# Altium PCB HUP2.PcbDoc
Units mm, origin at the board's own origin, x right, y up, seen from the top; angles counter-clockwise.
Board outline 41.45 x 18.25 mm, 2 copper layers (Top Layer, Bottom Layer), stack 0.325 mm thick; 40 components, 31 nets, 165 pads, 91 vias.
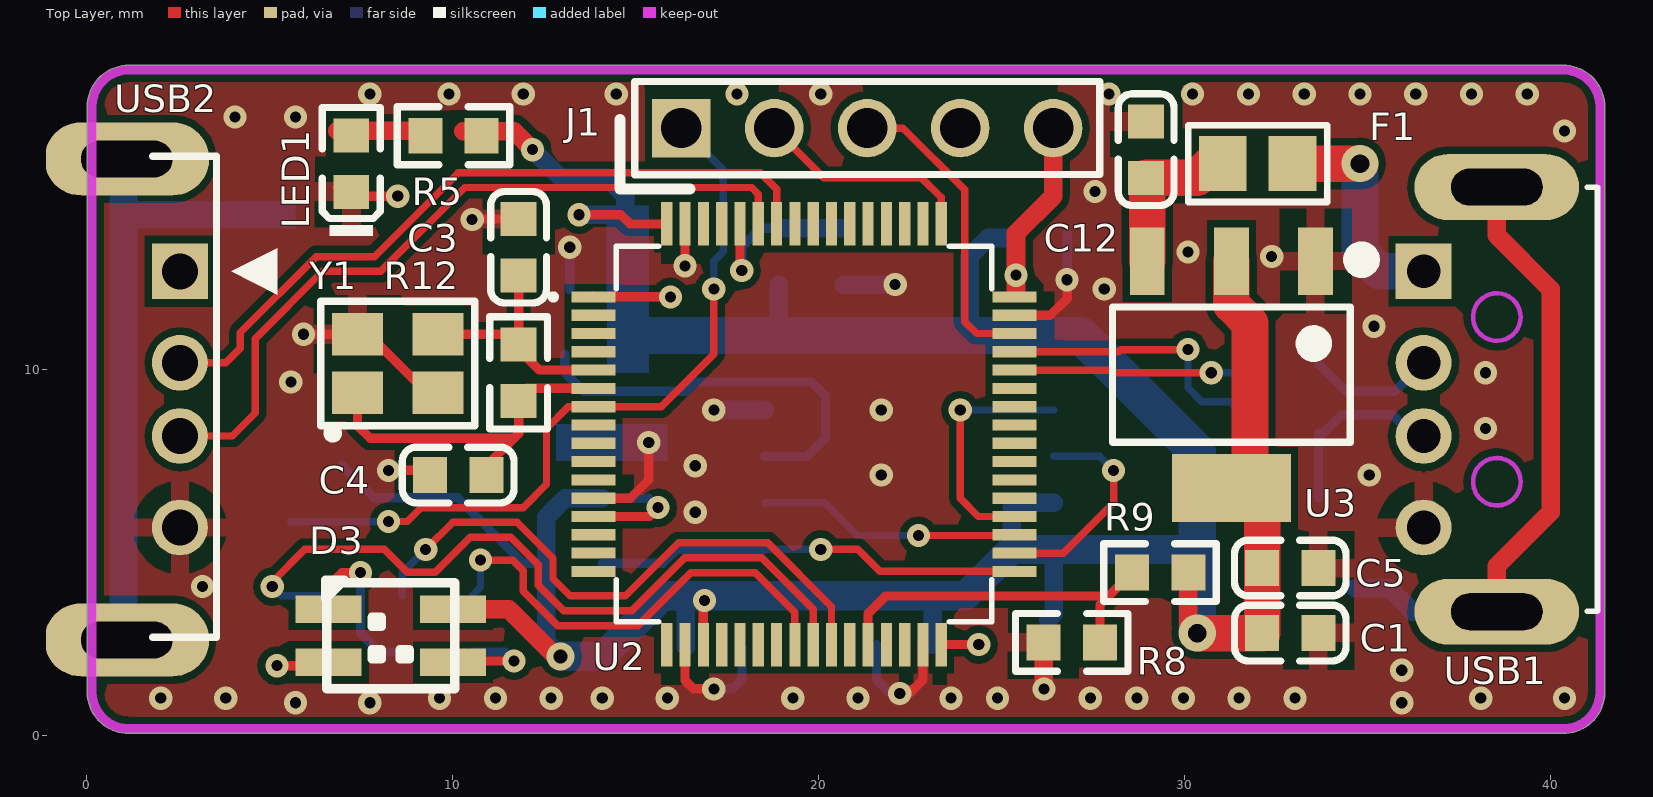
[diagram p0: Top Layer view]
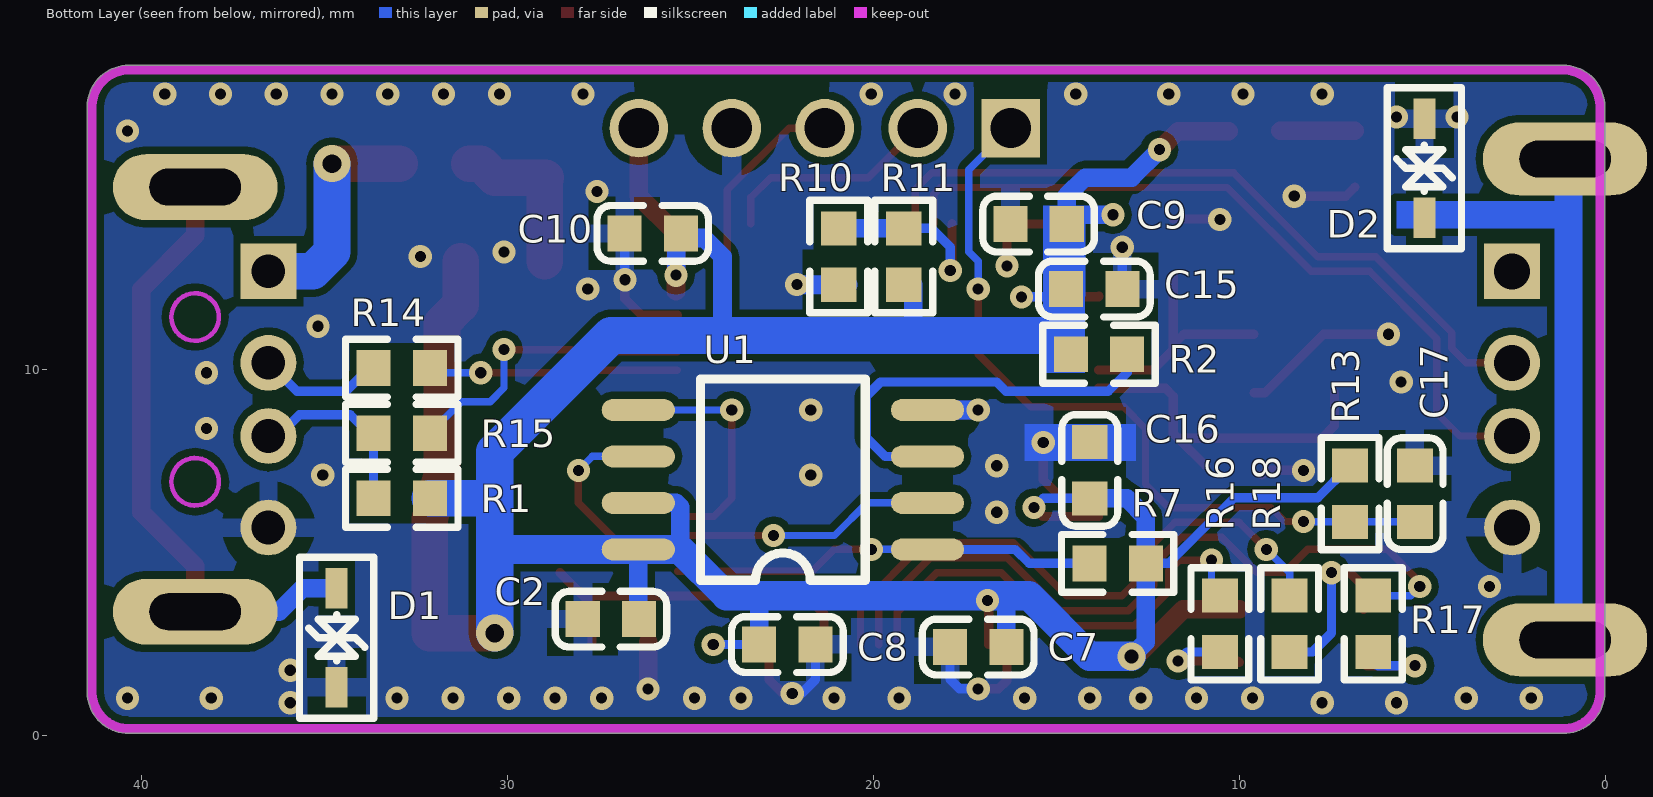
[diagram p1: Bottom Layer view, seen from below]

## Layer stack, top to bottom
Top Solder: solder mask 0.0102, Solder Resist, Dk 3.5
Top Layer: signal copper 0.0356
Dielectric 1: core 0.254, FR-4, Dk 4.2
Bottom Layer: signal copper 0.0356
Bottom Solder: solder mask 0.0102, Solder Resist, Dk 3.5

## Board outline
0.028,1.178 0.028,17.178 cw(c1.156,17.178) 1.156,18.305 40.356,18.305 cw(c40.356,17.178) 41.483,17.178 41.483,1.178 cw(c40.356,1.178) 40.356,0.051 1.156,0.051 cw(c1.156,1.178)

## Design rules (kind name [scope] priority, off if disabled: settings)
Clearance [All] p1: gap=0.203 except(0.152: SMDPad-SMDPad)
ComponentClearance [All] p1: gap=0 collisioncheckmode=3 verticalgap=0 showdistances=FALSE
HoleToHoleClearance [All] p1: gap=0 allowstackedmicrovias=TRUE
MinimumSolderMaskSliver [All] p1: minsoldermaskwidth=0
PolygonConnect via [isvia] p1: connectstyle=Direct reliefconductorwidth=0.254 reliefentries=4 polygonreliefangle="90 Angle" airgapwidth=0.254
PolygonConnect [All] p2: connectstyle=Relief reliefconductorwidth=0.508 reliefentries=4 polygonreliefangle="90 Angle" airgapwidth=0.508
RoutingVias [All] p1: holewidth=0.305 width=0.635 viastyle="Through Hole" minholewidth=0.305 minwidth=0.508 maxholewidth=0.711 maxwidth=1.27
SilkToSilkClearance [All] p1: silktosilkclearance=0
SilkToSolderMaskClearance [IsPad] p1: minsilkscreentomaskgap=0 clearancetoexposedcopper=TRUE
SolderMaskExpansion [All] p1: expansion=0.102
UnpouredPolygon [All] p1: allowunpoured=FALSE
Width [All] p1: maxlimit=2.54 minlimit=0.203 preferedwidth=0.254
24 further rules are at their usual default settings.

## Components (designator, comment, footprint, x,y, rotation, side; value= is the part's Value field where it differs from the comment)
C1 "100nF" C-0603 32.893,2.794 r180 top
C2 "100nF" C-0603 27.178,3.175 r0 bottom
C3 "20pF" C-0603 11.811,13.335 r270 top
C4 "20pF" C-0603 10.16,7.112 r180 top
C5 "10uF/16V" C-0603 32.893,4.572 r0 top
C7 "100nF" C-0603 17.145,2.413 r180 bottom
C8 "100nF" C-0603 22.359,2.48 r0 bottom
C9 "100nF" C-0603 15.494,13.97 r180 bottom
C10 "100nF" C-0603 26.035,13.716 r180 bottom
C12 "10uF/16V" C-0603 28.956,16.002 r90 top
C15 "100nF" C-0603 13.97,12.192 r180 bottom
C16 "100nF" C-0603 14.097,7.239 r270 bottom
C17 "100nF" C-0603 5.207,6.604 r90 bottom
D1 "LT-BV15C" SOD323T 34.671,2.667 r270 bottom
D2 "LT-BV15C" SOD323T 4.953,15.494 r90 bottom
D3 "RGB-SMD-4" RGB-SMD-4 8.636,3.175 r0 top
F1 "MSMD0805-050" R0805 32.004,15.621 r180 top
J1 "SIP_2.54_5P" SIP_2.54_5P 16.256,16.592 r0 top locked
LED1 "green" 0603_LED_S1 7.239,15.621 r90 top
R1 "1.5K" R-0603 32.893,6.477 r0 bottom
R2 "10K" R-0603 13.843,10.414 r180 bottom
R5 "1K" R-0603 10.033,16.383 r0 top
R7 "10K" R-0603 13.335,4.699 r0 bottom
R8 "10K" R-0603 26.924,2.54 r0 top
R9 "10K" R-0603 29.337,4.445 r180 top
R10 "10K" R-0603 20.955,13.081 r90 bottom
R11 "10K" R-0603 19.177,13.081 r90 bottom
R12 "1M" R-0603 11.811,9.906 r90 top
R13 "10K" R-0603 6.985,6.604 r90 bottom
R14 "R22" R-0603 32.893,10.033 r0 bottom
R15 "R22" R-0603 32.893,8.255 r0 bottom
R16 "330" R-0603 10.541,3.048 r270 bottom
R17 "330" R-0603 6.35,3.048 r270 bottom
R18 "330" R-0603 8.636,3.048 r270 bottom
U1 "W25Q64JVSSIQ" W25Q64JVSSIQ 22.479,6.985 r0 bottom locked
U2 "STM32F103RET6" LQFP64-10x10mm 19.609,8.23 r0 top locked
U3 "LM1117IMPX-3.3" SOT223 31.286,9.855 r270 top locked
USB1 "USB" USB-A-Plug-2 36.537,12.678 r90 top locked
USB2 "USB" "USB A HEADER" 2.556,12.678 r90 top locked
Y1 "8MHZ" TAS3225 8.509,10.16 r0 top

## Footprints (in the part's own frame and the unit in brackets; to place one, negate y for a bottom-side part, rotate by r counter-clockwise, add the part's x,y. Pads: shape width x height; smd on the part's side, far side on the other; paste and mask are expansions set on the pad)
0603_LED_S1 [mm]
  rect 0.93x0.98 smd: 1(0.77,0) 2(-0.77,0)
  silkscreen extent -1.97,-0.79 1.53,0.79
C-0603 [mm]
  rect 0.93x0.98 smd: 1(-0.77,0) 2(0.77,0)
  silkscreen extent -1.52,-0.76 1.52,0.76, body extent -0.85,-0.4 0.85,0.4, height 0.56
LQFP64-10x10mm [mm]
  rect 1.194x0.305 smd: 1(-5.75,3.75) 2(-5.75,3.25) 3(-5.75,2.75) 4(-5.75,2.25) 5(-5.75,1.75) 6(-5.75,1.25) 7(-5.75,0.75) 8(-5.75,0.25) 9(-5.75,-0.25) 10(-5.75,-0.75) 11(-5.75,-1.25) 12(-5.75,-1.75) 13(-5.75,-2.25) 14(-5.75,-2.75) 15(-5.75,-3.25) 16(-5.75,-3.75) 33(5.75,-3.75) 34(5.75,-3.25) 35(5.75,-2.75) 36(5.75,-2.25) 37(5.75,-1.75) 38(5.75,-1.25) 39(5.75,-0.75) 40(5.75,-0.25) 41(5.75,0.25) 42(5.75,0.75) 43(5.75,1.25) 44(5.75,1.75) 45(5.75,2.25) 46(5.75,2.75) 47(5.75,3.25) 48(5.75,3.75)
  rect 0.305x1.194 smd: 17(-3.75,-5.75) 18(-3.25,-5.75) 19(-2.75,-5.75) 20(-2.25,-5.75) 21(-1.75,-5.75) 22(-1.25,-5.75) 23(-0.75,-5.75) 24(-0.25,-5.75) 25(0.25,-5.75) 26(0.75,-5.75) 27(1.25,-5.75) 28(1.75,-5.75) 29(2.25,-5.75) 30(2.75,-5.75) 31(3.25,-5.75) 32(3.75,-5.75) 49(3.75,5.75) 50(3.25,5.75) 51(2.75,5.75) 52(2.25,5.75) 53(1.75,5.75) 54(1.25,5.75) 55(0.75,5.75) 56(0.25,5.75) 57(-0.25,5.75) 58(-0.75,5.75) 59(-1.25,5.75) 60(-1.75,5.75) 61(-2.25,5.75) 62(-2.75,5.75) 63(-3.25,5.75) 64(-3.75,5.75)
  silkscreen extent -6.93,-5.13 5.13,5.13, body extent -6,-6 6,6, height 1.6
R0805 [mm] "Atmel DOC:IPC"
  rect 1.3x1.5 smd: 1(-0.95,0) 2(0.95,0)
  silkscreen extent -1.9,-1.05 1.9,1.05, body extent -1.6,-0.75 1.6,0.75, height 0.51
R-0603 [mm]
  rect 0.93x0.98 smd: 1(-0.77,0) 2(0.77,0)
  silkscreen extent -1.53,-0.79 1.54,0.79, body extent -0.85,-0.4 0.85,0.4, height 0.56
RGB-SMD-4 [mm]
  rect 1.8x0.75 smd: 1(-2.021,0.27) 2(-2.021,-1.18) 3(1.379,-1.18) 4(1.379,0.27)
  silkscreen extent -2.1,-1.91 1.43,1.07
SIP_2.54_5P [mm]
  rect 1.6x1.6 hole 1.1: 1(0,0)
  round 1.6 hole 1.1: 2(2.54,0) 3(5.08,0) 4(7.62,0) 5(10.16,0)
  silkscreen extent -1.67,-1.67 11.43,1.27
SOD323T [mm]
  rect 1.1x0.6 smd: 1(1.35,0) 2(-1.35,0)
  silkscreen extent -2.2,-1.02 2.2,1.02
SOT223 [mm]
  rect 1.85x0.95 smd: 1(-3.1,2.3) 2(-3.1,0) 3(-3.1,-2.3)
  rect 1.85x3.25 smd: 4(3.1,0)
  silkscreen extent -3.39,-3.25 1.85,3.8
TAS3225 [mm]
  rect 1.4x1.15 smd: 1(-1.1,-0.8) 2(1.1,-0.8) 3(1.1,0.8) 4(-1.1,0.8)
  silkscreen extent -2.1,-2.03 2.1,1.7
"USB A HEADER" [mm]
  rect 1.524x1.524 hole 0.98: 1(0,0)
  round 1.524 hole 0.98: 2(-2.5,0) 3(-4.5,0) 4(-7,0)
  oval 2x4.5 hole 1 slot 2.5 at 90 deg: 5(3.07,1.45) 6(-10.07,1.45)
  silkscreen extent -10.5,-2.67 3.5,13
USB-A-Plug-2 [mm]
  rect 1.524x1.524 hole 0.92: 1(0,0)
  round 1.524 hole 0.92: 2(-2.5,0) 3(-4.5,0) 4(-7,0)
  oval 1.8x4.5 hole 1 slot 2.5 at 90 deg: 5(-9.3,-2) 6(2.3,-2)
  Keep-Out Layer circle w0.127: c-1.25,-2 r0.65
  Keep-Out Layer circle w0.127: c-5.75,-2 r0.65
  silkscreen extent -9.29,-4.75 2.3,-4.47
W25Q64JVSSIQ [mm]
  oval 2x0.6 smd: 1(-3.95,1.905) 2(-3.95,0.635) 3(-3.95,-0.635) 4(-3.95,-1.905) 5(3.95,-1.905) 6(3.95,-0.635) 7(3.95,0.635) 8(3.95,1.905)
  silkscreen extent -2.25,-2.75 2.25,2.75

## Part data
C1 C2 C7 C8 C9 C10: library part 100nF_0805
C3 C4 C17: library part 20pF_0805
C5 C12: library part 10uF_0805
C15: library part 1uF_0805
C16: library part 10nF_0805
D1 D2: library part LTBV05C
D3: library part RGB
F1: library part FB_1K/500mA_0805
LED1: library part LED1
R1 R8 R9 R10 R11 R13 R14 R15 R16 R17 R18: library part 10K±1%_0805
R2 R7: library part 4.7K±1%_0805
R5: library part 1K±1%_0805
R12: library part 1M±1%_0805
U2: library part STM32F10xRxT2, "Imported"
USB1 USB2: library part USB_A
Y1: library part 泰艺5032晶振8MHz

## Via types
v1: diameter 0.635, hole 0.305, Top Layer to Bottom Layer, 88 vias
v2: diameter 1.016, hole 0.508, Top Layer to Bottom Layer, 2 vias
v3: diameter 0.762, hole 0.381, Top Layer to Bottom Layer, 1 vias

## Nets (pads, with @x,y where several pads share a name; then routed paths per layer and width w, separated by ;. In a path a pad name is that pad's centre, name@x,y a point inside that pad or via, vN(x,y) a via of type N, cw(c..) or ccw(c..) an arc to the next point about the centre after c; other vN are vias at no path point)
+5V: C12.1 F1.2 U3.3 | length 4.5
  Top Layer w1: U3.3 28.986,15.202 C12.1 30.345,15.232 30.734,15.621 F1.2
BLUE: R18.1 U2.26 | length 16.4
  Top Layer w0.203: v1(9.271,5.08) 10.008,5.817 11.769,5.817 12.751,4.835 12.751,4.274 13.214,3.81 14.732,3.81 16.18,5.258 18.618,5.258 20.359,3.517 U2.26
  Bottom Layer w0.203: R18.1 8.636,4.445 v1(9.271,5.08)
BOOT0: R10.2 R11.2 U2.60 | length 4.9
  Top Layer w0.254: U2.60 17.859,12.748 v1(17.907,12.7)
  Bottom Layer w0.254: v1(17.907,12.7) 17.907,13.343 18.415,13.851 R11.2@18.923,13.851
  Bottom Layer w0.508: R11.2@18.923,13.851 R10.2@20.701,13.851
BOOT1: R8.2 R9.2 U2.28 | length 9.9
  Top Layer w0.254: U2.28 21.359,3.325 21.844,3.81 27.932,3.81 ; R8.2 27.694,3.572 27.932,3.81 ; R9.2 27.932,3.81
FLASH_SPI_CS: R7.2 U1.1 U2.33 | length 11.7
  Top Layer w0.203: v1(20.066,5.08) 21.082,5.08 21.682,4.48 U2.33
  Bottom Layer w0.203: U1.1 v1(20.066,5.08)
  Bottom Layer w0.254: R7.2 15.748,4.699 16.129,5.08 U1.1
FLASH_SPI_MISO: U1.2 U2.35 | length 7.2
  Top Layer w0.203: v1(22.733,5.461) 25.34,5.461 U2.35
  Bottom Layer w0.203: U1.2 20.18,6.35 21.069,5.461 v1(22.733,5.461)
FLASH_SPI_MOSI: U1.5 U2.36 | length 6.7
  Top Layer w0.203: v1(23.876,8.89) 23.876,6.477 24.373,5.98 U2.36
  Bottom Layer w0.203: v1(23.876,8.89) U1.5
FLASH_SPI_SCLK: U1.6 U2.34 | length 6
  Top Layer w0.203: U2.34 26.697,4.98 28.067,6.35 v1(28.067,7.239)
  Bottom Layer w0.203: U1.6 27.686,7.62 v1(28.067,7.239)
GND: C1.1 C2.2 C3.1 C4.2 C5.2 C7.1 C8.1 C9.1 C10.1 C12.2 C15.2 C16.1 C17.2 D1.1 D2.1 J1.4 LED1.2 R8.1 R10.1 U1.4 U2.12 U2.18 U2.31 U2.47 U2.63 U3.1 USB1.4 USB2.4 Y1.2 Y1.4 | length 29.4
  Top Layer w0.254: v1(5.931,10.96) Y1.4 7.709,10.96 9.309,9.36 Y1.2 ; LED1.2@6.858,14.978 7.104,14.732 v1(8.509,14.732) ; v1(8.255,7.239) 9.263,7.239 C4.2 ; v1(10.541,14.097) 10.549,14.105 C3.1 ; U2.12 14.862,6.48 15.367,6.985 v1(15.367,8.001) ; U2.18 16.359,1.5 16.589,1.27 v1(17.145,1.27) ; v1(16.359,12.827) U2.63 ; v1(22.225,1.143) 22.479,1.143 22.859,1.523 U2.31 ; U2.47 26.339,11.48 26.797,11.938 v1(26.797,12.446)
  Top Layer w0.508: R8.1 26.154,1.278 v1(26.162,1.27)
  Bottom Layer w0.254: C15.2 13.208,12.2 v1(13.208,13.335) ; C16.1 14.105,8.001 v1(15.367,8.001) ; v1(17.145,1.27) 17.653,1.27 17.915,1.532 C7.1 ; C8.1 21.589,1.525 21.971,1.143 v1(22.225,1.143) ; v1(26.797,12.446) 26.797,13.708 C10.1
  Bottom Layer w0.508: v1(17.145,8.89) U1.4 ; R10.1@20.701,12.311 22.09,12.311 v1(22.098,12.319)
  other v1: 5.715,0.889 7.747,0.889 35.941,0.889 2.032,1.016 3.81,1.016 9.652,1.016 11.176,1.016 12.7,1.016 14.097,1.016 15.875,1.016 19.304,1.016 21.082,1.016 23.622,1.016 24.892,1.016 27.432,1.016 28.702,1.016 29.972,1.016 31.496,1.016 33.02,1.016 38.1,1.016 40.386,1.016 35.941,1.778 3.175,4.064 16.637,6.096 21.717,7.112 35.052,7.112 16.637,7.366 38.227,8.382 21.717,8.89 5.588,9.652 38.227,9.906 35.179,11.176 27.813,12.192 32.385,13.081 30.099,13.208 27.559,14.859 40.386,16.51 4.064,16.891 5.715,16.891 7.747,17.526 9.906,17.526 11.938,17.526 14.478,17.526 17.78,17.526 20.066,17.526 27.94,17.526 30.226,17.526 31.75,17.526 33.274,17.526 34.798,17.526 36.322,17.526 37.846,17.526 39.37,17.526
GREEN: R17.1 U2.25 | length 20.9
  Top Layer w0.203: v1(5.08,4.064) 5.08,4.191 5.969,5.08 8.141,5.08 8.763,4.458 9.538,4.458 10.49,5.41 11.601,5.41 12.344,4.666 12.344,4.105 13.046,3.404 14.9,3.404 16.348,4.851 18.45,4.851 19.859,3.442 U2.25
  Bottom Layer w0.203: v1(5.08,4.064) 5.326,3.818 R17.1 R17.1@6.604,3.818
NetC3_2: C3.2 R12.2 U2.5 Y1.3 | length 6.6
  Top Layer w0.254: Y1.3 11.527,10.96 R12.2 ; C3.2 R12.2 ; U2.5 12.372,9.98 11.811,10.541 R12.2
NetC4_1: C4.1 R12.1 U2.6 Y1.1 | length 9.7
  Top Layer w0.254: Y1.1 7.409,8.466 7.755,8.12 11.684,8.12 ; C4.1@10.93,7.366 11.684,8.12 ; U2.6 12.028,9.48 11.811,9.263 R12.1 11.811,8.247 11.684,8.12
NetD1_2: D1.2 USB1.5 USB1.6 | length 16.9
  Top Layer w0.508: USB1.5 38.537,4.628 40.005,6.096 40.005,12.192 38.537,13.66 USB1.6
  Bottom Layer w0.508: D1.2 35.607,4.017 36.246,3.378 USB1.5
NetD2_2: D2.2 USB2.5 USB2.6
NetD3_1: D3.1 R18.2 | length 4.7
  Top Layer w0.254: D3.1 6.615,4.075 6.985,4.445 v1(7.493,4.445)
  Bottom Layer w0.254: v1(7.493,4.445) 7.493,2.794 8.009,2.278 R18.2
NetD3_2: D3.2 R17.2 | length 3
  Top Layer w0.254: v1(5.207,1.905) 6.525,1.905 D3.2
  Bottom Layer w0.254: v1(5.207,1.905) 6.231,1.905 R17.2@6.604,2.278
NetD3_3: D3.3 R16.2 | length 2.9
  Top Layer w0.254: D3.3 10.052,2.032 v1(11.684,2.032)
  Bottom Layer w0.254: R16.2 11.438,2.278 v1(11.684,2.032)
NetF1_1: F1.1 USB1.1 | length 6.2
  Top Layer w1: F1.1 v2(34.798,15.621)
  Bottom Layer w1: v2(34.798,15.621) 34.798,13.208 35.328,12.678 USB1.1
NetLED1_1: LED1.1 R5.1 | length 2
  Top Layer w0.508: LED1.1@6.858,16.518 R5.1@8.89,16.518
NetR1_2: R1.2 R15.2 USB1.3 | length 5.2
  Bottom Layer w0.254: R1.2 R15.2@33.663,8.128 ; R15.2 R15.2@33.663,8.128 ; USB1.3 36.272,8.178 35.687,8.763 34.298,8.763 R15.2@33.663,8.128
NetR2_2: R2.2 U1.3 | length 11.1
  Bottom Layer w0.254: R2.2 13.073,9.914 13.589,9.398 16.383,9.398 16.637,9.652 19.812,9.652 20.193,9.271 20.193,8.128 19.685,7.62 U1.3
NetR14_2: R14.2 USB1.2 | length 3.5
  Bottom Layer w0.254: R14.2@33.663,10.16 33.663,10.152 34.417,9.398 35.757,9.398 USB1.2
RED: R16.1 U2.24 | length 12.7
  Top Layer w0.203: v1(10.77,4.788) 11.648,4.788 11.938,4.498 11.938,3.937 12.878,2.997 15.069,2.997 16.516,4.445 18.282,4.445 19.359,3.368 U2.24
  Bottom Layer w0.203: R16.1 10.77,4.047 v1(10.77,4.788)
RESET: C17.1 J1.1 R13.1 U2.7 | length 21.1
  Top Layer w0.203: v1(8.255,5.842) 8.763,5.842 9.144,6.223 11.938,6.223 12.573,6.858 12.573,8.382 13.171,8.98 U2.7 15.711,8.98 17.145,10.414 v1(17.145,12.192)
  Bottom Layer w0.203: C17.1@5.588,5.834 v1@8.255,5.834 ; J1.1@16.224,16.624 J1.1 17.399,15.449 17.399,13.208 17.145,12.954 v1(17.145,12.192)
SWCLK: J1.2 U2.49 | length 6.1
  Top Layer w0.203: J1.2 20.148,15.24 22.815,15.24 23.359,14.696 U2.49
SWDIO: J1.3 U2.46 | length 8.5
  Top Layer w0.203: J1.3 22.314,16.592 24.003,14.903 24.003,11.303 24.326,10.98 U2.46
U1_RXD: U2.59 USB2.3 | length 20.5
  Top Layer w0.203: USB2.3@2.756,8.178 3.987,8.178 4.615,8.806 4.615,10.838 6.452,12.675 8.042,12.675 10.336,14.968 18.179,14.968 18.359,14.788 U2.59
U1_TXD: U2.58 USB2.2 | length 19.6
  Top Layer w0.203: USB2.2@2.756,10.178 3.81,10.178 4.209,10.577 4.209,11.007 6.283,13.081 7.874,13.081 10.167,15.374 18.408,15.374 18.859,14.923 U2.58
USBDM: R14.1 U2.44 | length 6.8
  Top Layer w0.203: U2.44 27.993,9.98 28.067,9.906 v1(30.734,9.906)
  Bottom Layer w0.203: v1(30.734,9.906) 31.996,9.906 R14.1
USBDP: R15.1 U2.45 | length 8.4
  Top Layer w0.203: U2.45 28.194,10.48 28.255,10.541 v1(30.099,10.541)
  Bottom Layer w0.203: v1(30.099,10.541) 30.099,9.495 30.48,9.114 31.272,9.114 32.123,8.263 R15.1
VCC3V3: C1.2 C2.1 C5.1 C7.2 C8.2 C9.2 C10.2 C15.1 C16.2 D3.4 J1.5 R1.1 R2.1 R5.2 R7.1 R9.1 R11.1 R13.2 U1.7 U1.8 U2.1 U2.13 U2.19 U2.32 U2.48 U2.64 U3.2 U3.4 | length 112.2
  Top Layer w0.254: v1(13.462,14.224) 14.605,14.224 14.859,13.97 15.849,13.97 U2.64 ; U2.1@13.843,11.995 U2.1 v1(15.96,11.98) ; U2.13 15.378,5.98 v1(15.621,6.223) ; U2.19 16.859,3.651 v1(16.891,3.683) ; U2.32 v1(24.384,2.48)
  Top Layer w0.508: D3.4 11.541,3.445 12.827,2.159 v3(12.954,2.159) ; 10.295,16.51 11.684,16.51 v1(12.192,16.002) ; U2.48@25.4,12.13 v1(25.4,12.573) 25.4,13.716 26.416,14.732 J1.5 ; R9.1 30.107,3.04 v2(30.353,2.794)
  Top Layer w1: v2(30.353,2.794) C1.2 C5.1 32.123,5.918 31.855,6.909 31.794,7.136 31.794,11.259 31.286,11.767 U3.2
  Bottom Layer w0.254: R13.2 7.869,6.49 10.147,6.49 11.938,4.699 R7.1 ; C16.2@14.097,6.477 15.367,6.477 v1(15.621,6.223) ; C9.2@14.47,14.224 C9.2 ; C15.1 14.952,11.98 v1(15.96,11.98) ; C8.2 v1(24.384,2.48)
  Bottom Layer w0.508: v1(12.192,16.002) 12.954,15.24 14.224,15.24 14.724,14.74 C9.2 ; v3(12.954,2.159) 12.565,2.548 R7.1 12.565,5.961 13.081,6.477 C16.2@14.097,6.477 ; v1(13.462,14.224) C9.2@14.47,14.224 ; C7.2 16.375,3.81 16.383,3.818 ; 17.907,3.818 17.915,3.81 ; 18.923,10.922 R11.1@18.923,12.311 ; C8.2 23.129,3.922 ; 24.13,10.922 24.13,13.081 24.638,13.589 25.392,13.589 25.392,12.581 v1(25.4,12.573) ; 25.289,5.08 25.289,6.239 25.4,6.35 U1.7 ; C2.1@26.281,3.175 26.429,3.323 U1.8
  Bottom Layer w0.8: v3(12.954,2.159) 14.097,2.159 15.756,3.818 16.383,3.818 17.907,3.818 24.027,3.818 25.289,5.08 U1.8 30.353,5.08
  Bottom Layer w1: 30.353,6.604 30.48,6.477 R1.1
  Bottom Layer w1.016: C15.1@14.724,12.073 C9.2 ; 14.859,10.922 18.923,10.922 24.13,10.922 27.178,10.922 30.353,7.747 30.353,6.604 30.353,5.08 v2(30.353,2.794)
pads on no net: U2.2 U2.3 U2.4 U2.8 U2.9 U2.10 U2.11 U2.14 U2.15 U2.16 U2.17 U2.20 U2.21 U2.22 U2.23 U2.27 U2.29 U2.30 U2.37 U2.38 U2.39 U2.40 U2.41 U2.42 U2.43 U2.50 U2.51 U2.52 U2.53 U2.54 U2.55 U2.56 U2.57 U2.61 U2.62 USB2.1

## Polygon pours and split planes (outlines as drawn)
GND on Top Layer "GND" (solid, remove dead copper, pour order 4): -0.254,18.542 41.656,18.542 41.656,0 -0.254,0 -0.254,18.542
GND on Bottom Layer "GND" (solid, remove dead copper, pour order 3): -0.254,18.542 41.656,18.542 41.656,0 -0.254,0 -0.254,18.542

## Keep-outs
Keep-Out Layer:
  lines w0.254: 0.156,1.458 0.156,1.178 ; 0.156,16.898 0.156,17.178 cw(c1.156,17.178) 1.156,18.178 40.356,18.178 cw(c40.356,17.178) 41.356,17.178 41.356,1.178 cw(c40.356,1.178) 40.356,0.178 1.156,0.178 cw(c1.156,1.178) 0.156,1.178 ; 0.156,17.038 0.156,1.178

## Other copper
Bottom Layer:
  rectangle net VCC3V3: 14.224,9.906 15.367,14.478
  rectangle net NetD2_2: 0.635,1.778 1.397,16.637
  rectangle net NetD2_2: 0.889,13.843 5.715,14.605
  rectangle net GND: 12.827,7.493 15.875,8.509

## Silkscreen, mask and mechanical layers (free items; w line width, h text height)
Top Overlay:
  lines w0.353: 69.197,-1.869 147.761,-1.869 ; 69.197,5.693 147.761,5.693 ; 69.197,13.278 147.761,13.278 ; 69.197,20.841 147.761,20.841 ; 69.197,28.425 147.761,28.425 ; 69.197,35.988 147.761,35.988 ; 69.197,43.573 147.761,43.573 ; 69.197,51.135 147.761,51.135 ; 69.197,58.72 147.761,58.72 ; 69.197,66.283 147.761,66.283 ; 69.197,74 147.761,74 ; 69.197,81.585 147.761,81.585 ; 69.373,-1.693 69.373,81.761 ; 94.694,-1.693 94.694,81.761 ; 147.585,-1.693 147.585,81.761
  text "外" at 71.863,76.469 h3.42
  text "形" at 75.391,76.469 h3.42
  text "严格按照keepoutlayer层加工" at 97.028,76.454 h3.42
  text "41.2mm" at 97.028,69.088 h3.42
  text "长" at 71.863,69.061 h3.42
  text "宽" at 71.863,61.3 h3.42
  text "18mm" at 97.028,61.214 h3.42
  text "板" at 71.863,53.892 h3.42
  text "层" at 75.391,53.892 h3.42
  text "数" at 78.919,53.892 h3.42
  text "2" at 97.028,53.848 h3.42
  text "拼" at 71.863,46.13 h3.42
  text "版" at 75.391,46.13 h3.42
  text "1" at 97.028,46.101 h3.42
  text "1.0mm" at 97.028,38.735 h3.42
  text "板" at 71.863,38.722 h3.42
  text "厚" at 75.391,38.722 h3.42
  text "绿" at 97.028,30.988 h3.42
  text "阻" at 71.863,30.961 h3.42
  text "焊" at 75.391,30.961 h3.42
  text "颜" at 78.919,30.961 h3.42
  text "色" at 82.447,30.961 h3.42
  text "字" at 71.863,23.553 h3.42
  text "符" at 75.391,23.553 h3.42
  text "色" at 78.919,23.553 h3.42
  text "白" at 97.028,23.495 h3.42
  text "阻" at 71.863,15.792 h3.42
  text "焊" at 75.391,15.792 h3.42
  text "覆" at 78.919,15.792 h3.42
  text "盖" at 82.447,15.792 h3.42
  text "过孔盖油" at 97.028,15.748 h3.42
  text "飞" at 71.863,8.383 h3.42
  text "针" at 75.391,8.383 h3.42
  text "测" at 78.919,8.383 h3.42
  text "试" at 82.447,8.383 h3.42
  text "全部测试" at 97.028,8.382 h3.42
  text "无铅喷锡" at 97.028,0.635 h3.42
  text "焊" at 71.863,0.622 h3.42
  text "盘" at 75.391,0.622 h3.42
  text "喷" at 78.919,0.622 h3.42
  text "镀" at 82.447,0.622 h3.42

## Dimensions
0.156,17.038 to 41.356,17.178 on Top Overlay
39.243,18.178 to 39.116,0.178 on Top Overlay